# EAGLE board eurorack-bela (EAGLE 6.6.0)
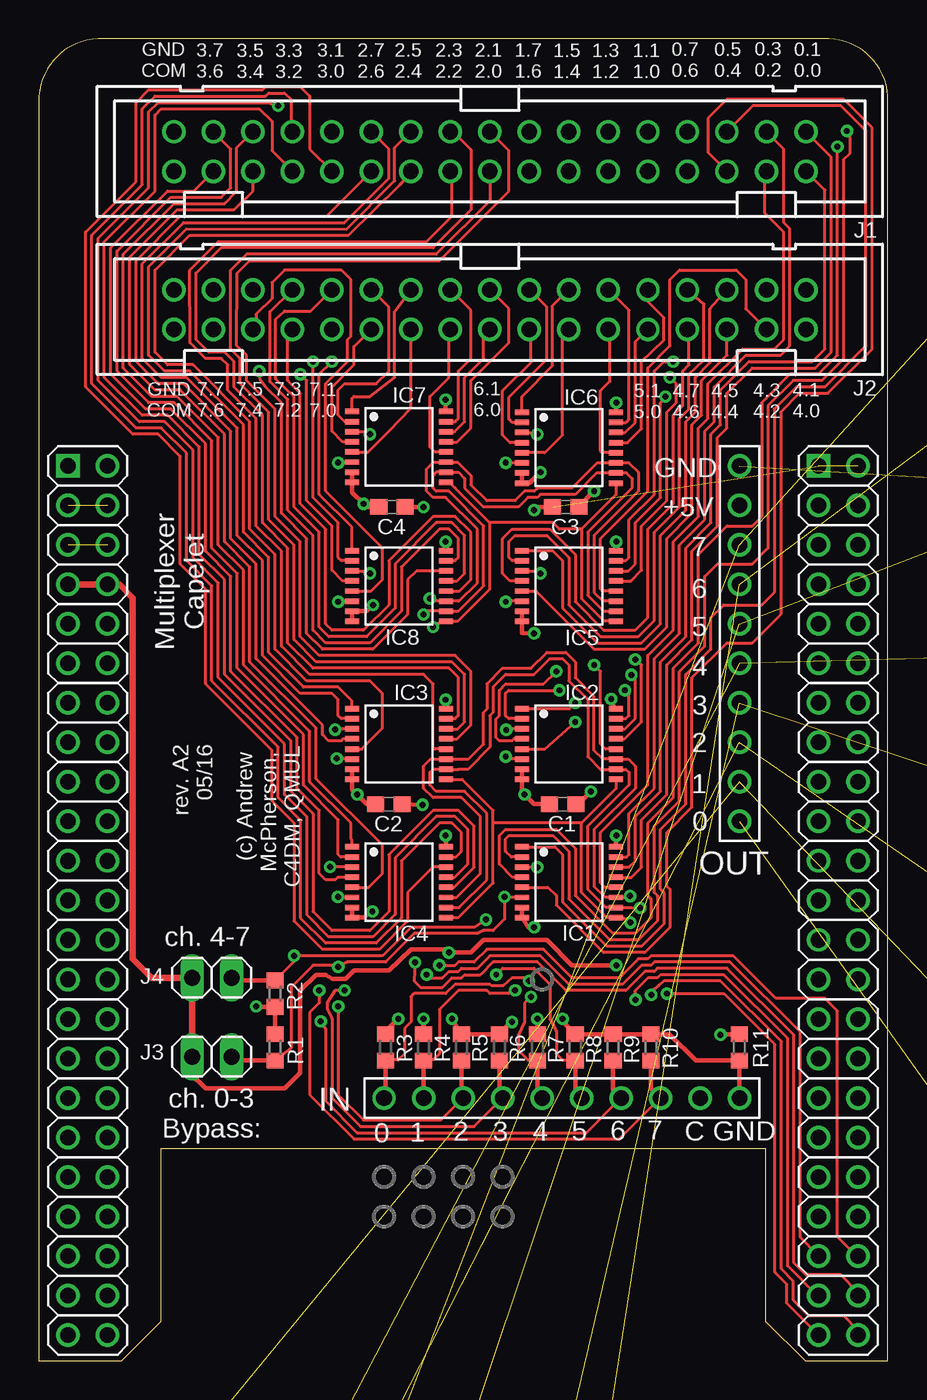
[diagram p0: board, top side]
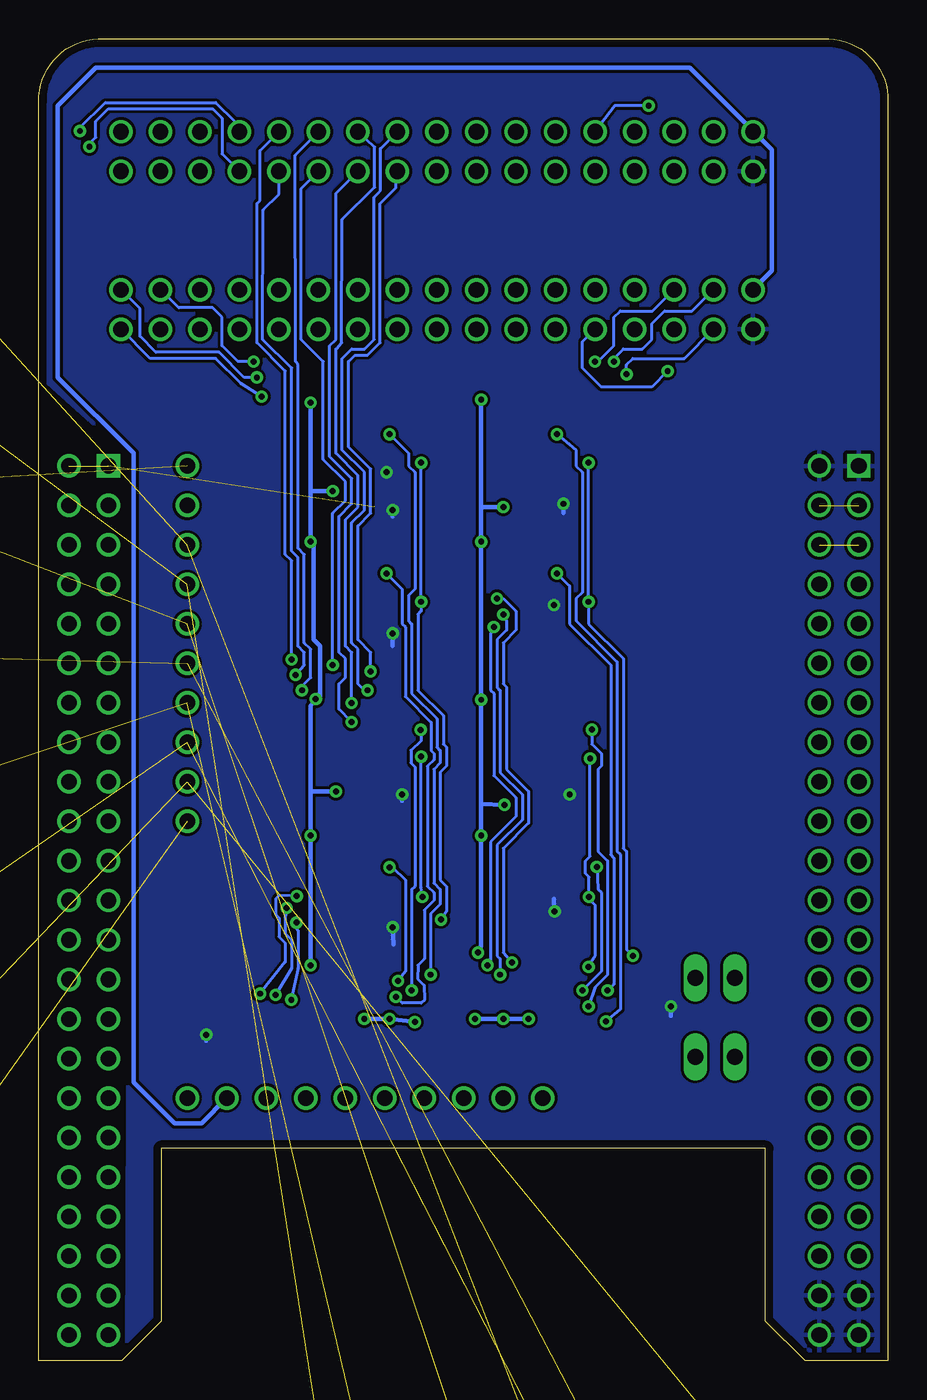
[diagram p1: board, bottom side, seen from below]

Size 54.61 x 84.99 mm. Coordinates in mm from the lower left corner, seen from the top.
Outline: 54.61,0 54.61,80.95 arc90 50.8,84.99 3.81,84.99 arc90 0,80.95 0,0 5.33,0 7.87,2.54 7.87,13.64 46.74,13.64 46.74,2.54 49.28,0 54.61,0
Copper layers (1*16): Top 0.035mm / dielectric 1.5mm / Bottom 0.035mm
Design rules "default *": minimum track width 7mil, minimum drill 15mil, track to track 7mil, track to pad 7mil, pad to pad 7mil, via to via 7mil, smd to smd 0mil, copper to edge 20mil, drill to drill 8mil, minimum pad ring 10mil, minimum via ring 8mil, stop-mask expansion 4mil, vias tented up to drill 20mil, thermal gap 10mil

## Footprints (pad centres in the part's own frame; a part is rotated, then mirrored left to right if it is on the bottom)
C0603 = smd 1.1 x 1: 1 -0.85,0; 2 0.85,0
TSSOP16-PW = smd 0.35 x 0.9: 1 -2.275,-3.025; 2 -1.625,-3.025; 3 -0.975,-3.025; 4 -0.325,-3.025; 5 0.325,-3.025; 6 0.975,-3.025; 7 1.625,-3.025; 8 2.275,-3.025; 9 2.275,3.025; 10 1.625,3.025; 11 0.975,3.025; 12 0.325,3.025; 13 -0.325,3.025; 14 -0.975,3.025; 15 -1.625,3.025; 16 -2.275,3.025
PAK100/2500-34 = drill 1 pad 1.422: 1 -20.32,-1.27; 2 -20.32,1.27; 3 -17.78,-1.27; 4 -17.78,1.27; 5 -15.24,-1.27; 6 -15.24,1.27; 7 -12.7,-1.27; 8 -12.7,1.27; 9 -10.16,-1.27; 10 -10.16,1.27; 11 -7.62,-1.27; 12 -7.62,1.27; 13 -5.08,-1.27; 14 -5.08,1.27; 15 -2.54,-1.27; 16 -2.54,1.27; 17 0,-1.27; 18 0,1.27; 19 2.54,-1.27; 20 2.54,1.27; 21 5.08,-1.27; 22 5.08,1.27; 23 7.62,-1.27; 24 7.62,1.27; 25 10.16,-1.27; 26 10.16,1.27; 27 12.7,-1.27; 28 12.7,1.27; 29 15.24,-1.27; 30 15.24,1.27; 31 17.78,-1.27; 32 17.78,1.27; 33 20.32,-1.27; 34 20.32,1.27
1X02 = drill 1.016 long: 1 -1.27,0; 2 1.27,0
JACK-3.5 = drill 1.1: P$1 0,5; P$2 0,-3.5; P$3 0,-6.5 | drill 3: P$4 0,0
R0603 = smd 1 x 1.1: 1 -0.85,0; 2 0.85,0
BELA_CAPELET_NO_OUTLINE = drill 1 square: 1 -20.32,-31.75; 47 27.94,-31.75 | drill 1: 2 -22.86,-31.75; 3 -20.32,-29.21; 4 -22.86,-29.21; 5 -20.32,-26.67; 6 -22.86,-26.67; 7 -20.32,-24.13; 8 -22.86,-24.13; 9 -20.32,-21.59; 10 -22.86,-21.59; 11 -20.32,-19.05; 12 -22.86,-19.05; 13 -20.32,-16.51; 14 -22.86,-16.51; 15 -20.32,-13.97; 16 -22.86,-13.97; 17 -20.32,-11.43; 18 -22.86,-11.43; 19 -20.32,-8.89; 20 -22.86,-8.89; 21 -20.32,-6.35; 22 -22.86,-6.35; 23 -20.32,-3.81; 24 -22.86,-3.81; 25 -20.32,-1.27; 26 -22.86,-1.27; 27 -20.32,1.27; 28 -22.86,1.27; 29 -20.32,3.81; 30 -22.86,3.81; 31 -20.32,6.35; 32 -22.86,6.35; 33 -20.32,8.89; 34 -22.86,8.89; 35 -20.32,11.43; 36 -22.86,11.43; 37 -20.32,13.97; 38 -22.86,13.97; 39 -20.32,16.51; 40 -22.86,16.51; 41 -20.32,19.05; 42 -22.86,19.05; 43 -20.32,21.59; 44 -22.86,21.59; 45 -20.32,24.13; 46 -22.86,24.13; 48 25.4,-31.75; 49 27.94,-29.21; 50 25.4,-29.21; 51 27.94,-26.67; 52 25.4,-26.67; 53 27.94,-24.13; 54 25.4,-24.13; 55 27.94,-21.59; 56 25.4,-21.59; 57 27.94,-19.05; 58 25.4,-19.05; 59 27.94,-16.51; 60 25.4,-16.51; 61 27.94,-13.97; 62 25.4,-13.97; 63 27.94,-11.43; 64 25.4,-11.43; 65 27.94,-8.89; 66 25.4,-8.89; 67 27.94,-6.35; 68 25.4,-6.35; 69 27.94,-3.81; 70 25.4,-3.81; 71 27.94,-1.27; 72 25.4,-1.27; 73 27.94,1.27; 74 25.4,1.27; 75 27.94,3.81; 76 25.4,3.81; 77 27.94,6.35; 78 25.4,6.35; 79 27.94,8.89; 80 25.4,8.89; 81 27.94,11.43; 82 25.4,11.43; 83 27.94,13.97; 84 25.4,13.97; 85 27.94,16.51; 86 25.4,16.51; 87 27.94,19.05; 88 25.4,19.05; 89 27.94,21.59; 90 25.4,21.59; 91 27.94,24.13; 92 25.4,24.13; IN_PIN1 7.62,8.89; IN_PIN2 5.08,8.89; IN_PIN3 2.54,8.89; IN_PIN4 0,8.89; IN_PIN5 -2.54,8.89; IN_PIN6 -5.08,8.89; IN_PIN7 -7.62,8.89; IN_PIN8 -10.16,8.89; IN_PIN9 -12.7,8.89; IN_PIN10 -15.24,8.89; OUT_PIN1 -15.24,-8.89; OUT_PIN2 -15.24,-11.43; OUT_PIN3 -15.24,-13.97; OUT_PIN4 -15.24,-16.51; OUT_PIN5 -15.24,-19.05; OUT_PIN6 -15.24,-21.59; OUT_PIN7 -15.24,-24.13; OUT_PIN8 -15.24,-26.67; OUT_PIN9 -15.24,-29.21; OUT_PIN10 -15.24,-31.75

## Placement (x,y rotation side)
C1  [C0603]  33.68,35.79 180 top
C2  [C0603]  22.5,35.79 180 top
C3  [C0603]  33.88,54.89 180 top
C4  [C0603]  22.71,54.89 180 top
IC1  4051B  [TSSOP16-PW]  34.09,30.76 270 top
IC2  4051B  [TSSOP16-PW]  34.09,39.65 270 top
IC3  4051B  [TSSOP16-PW]  23.16,39.65 270 top
IC4  4051B  [TSSOP16-PW]  23.16,30.76 270 top
IC5  4051B  [TSSOP16-PW]  34.09,49.81 270 top
IC6  4051B  [TSSOP16-PW]  34.09,58.7 270 top
IC7  4051B  [TSSOP16-PW]  23.16,58.75 270 top
IC8  4051B  [TSSOP16-PW]  23.16,49.81 270 top
J1  2534-  [PAK100/2500-34]  29.01,77.75 180 top
J2  2534-  [PAK100/2500-34]  29.01,67.59 180 top
J3  [1X02]  11.13,19.53 0 top
J4  [1X02]  11.13,24.61 0 top
JACK_IN_1  WQP_PJ301M-12_JACKWQP_PJ301M-12_JACK  [JACK-3.5]  20.57,-46.05 0 top  (outside the outline)
JACK_IN_2  WQP_PJ301M-12_JACKWQP_PJ301M-12_JACK  [JACK-3.5]  7.87,-13.03 0 top  (outside the outline)
JACK_IN_3  WQP_PJ301M-12_JACKWQP_PJ301M-12_JACK  [JACK-3.5]  20.57,-13.03 0 top  (outside the outline)
JACK_IN_4  WQP_PJ301M-12_JACKWQP_PJ301M-12_JACK  [JACK-3.5]  33.27,-13.03 0 top  (outside the outline)
JACK_IN_5  WQP_PJ301M-12_JACKWQP_PJ301M-12_JACK  [JACK-3.5]  7.87,-30.81 0 top  (outside the outline)
JACK_IN_6  WQP_PJ301M-12_JACKWQP_PJ301M-12_JACK  [JACK-3.5]  20.57,-30.81 0 top  (outside the outline)
JACK_IN_7  WQP_PJ301M-12_JACKWQP_PJ301M-12_JACK  [JACK-3.5]  33.27,-30.81 0 top  (outside the outline)
JACK_IN_8  WQP_PJ301M-12_JACKWQP_PJ301M-12_JACK  [JACK-3.5]  7.87,-48.59 0 top  (outside the outline)
JACK_OUT_1  WQP_PJ301M-12_JACKWQP_PJ301M-12_JACK  [JACK-3.5]  71.37,4.75 90 top  (outside the outline)
JACK_OUT_2  WQP_PJ301M-12_JACKWQP_PJ301M-12_JACK  [JACK-3.5]  71.37,14.91 90 top  (outside the outline)
JACK_OUT_3  WQP_PJ301M-12_JACKWQP_PJ301M-12_JACK  [JACK-3.5]  71.37,25.07 90 top  (outside the outline)
JACK_OUT_4  WQP_PJ301M-12_JACKWQP_PJ301M-12_JACK  [JACK-3.5]  71.37,35.23 90 top  (outside the outline)
JACK_OUT_5  WQP_PJ301M-12_JACKWQP_PJ301M-12_JACK  [JACK-3.5]  71.37,45.39 90 top  (outside the outline)
JACK_OUT_6  WQP_PJ301M-12_JACKWQP_PJ301M-12_JACK  [JACK-3.5]  71.37,55.55 90 top  (outside the outline)
JACK_OUT_7  WQP_PJ301M-12_JACKWQP_PJ301M-12_JACK  [JACK-3.5]  71.37,65.71 90 top  (outside the outline)
JACK_OUT_8  WQP_PJ301M-12_JACKWQP_PJ301M-12_JACK  [JACK-3.5]  71.37,75.87 90 top  (outside the outline)
R1  [R0603]  15.19,20.14 270 top
R2  [R0603]  15.19,23.6 90 top
R3  [R0603]  22.3,20.14 270 top
R4  [R0603]  24.74,20.14 270 top
R5  [R0603]  27.18,20.14 270 top
R6  [R0603]  29.62,20.14 270 top
R7  [R0603]  32.05,20.14 270 top
R8  [R0603]  34.49,20.14 270 top
R9  [R0603]  36.93,20.14 270 top
R10  [R0603]  39.37,20.14 270 top
R11  0  [R0603]  45.06,20.14 90 top
U$1  BELA_CAPELET_NO_OUT  [BELA_CAPELET_NO_OUTLINE]  29.82,25.78 180 top

## Library data of the parts
C1-C4 = resistor
IC1-IC8 U$1 = custom
J1 J2 = con-3m; OC_FARNELL: unknown; OC_NEWARK: unknown
J3 J4 = pinhead
JACK_IN_1-JACK_IN_8 JACK_OUT_1-JACK_OUT_8 = thonkiconn_eagle_v5
R1-R11 = rcl

## Nets
+5V: C1.1 C2.1 C3.1 C4.1 IC1.16 IC2.16 IC3.16 IC4.16 IC5.16 IC6.16 IC7.16 IC8.16 J3.1 J4.1 U$1.53 U$1.54
AIN0: U$1.85
GND: C1.2 C2.2 C3.2 C4.2 IC1.7 IC1.8 IC2.7 IC2.8 IC3.7 IC3.8 IC4.7 IC4.8 IC5.7 IC5.8 IC6.7 IC6.8 IC7.7 IC7.8 IC8.7 IC8.8 J1.34 J2.34 R1.1 R2.1 R11.2 U$1.1 U$1.2 U$1.47 U$1.48 U$1.89 U$1.90 U$1.91 U$1.92
IN0: IC1.3 R3.2 U$1.IN_PIN1
IN1: IC2.3 R4.2 U$1.IN_PIN2
IN2: IC3.3 R5.2 U$1.IN_PIN3
IN3: IC4.3 R6.2 U$1.IN_PIN4
IN4: IC5.3 R7.2 U$1.IN_PIN5
IN5: IC6.3 R8.2 U$1.IN_PIN6
IN6: IC7.3 R9.2 U$1.IN_PIN7
IN7: IC8.3 R10.2 U$1.IN_PIN8
IN_COM: J1.33 J2.33 U$1.IN_PIN9
IN_GND: R3.1 R4.1 R5.1 R6.1 R7.1 R8.1 R9.1 R10.1 R11.1 U$1.IN_PIN10
J2: IC7.15 J2.19
MUX1A: IC1.11 IC2.11 IC3.11 IC4.11 U$1.45
MUX1B: IC1.10 IC2.10 IC3.10 IC4.10 U$1.46
MUX1C: IC1.9 IC2.9 IC3.9 IC4.9 U$1.43
MUX1INH: IC1.6 IC2.6 IC3.6 IC4.6 J3.2 R1.2
MUX2A: IC5.11 IC6.11 IC7.11 IC8.11 U$1.44
MUX2B: IC5.10 IC6.10 IC7.10 IC8.10 U$1.41
MUX2C: IC5.9 IC6.9 IC7.9 IC8.9 U$1.42
MUX2INH: IC5.6 IC6.6 IC7.6 IC8.6 J4.2 R2.2
N$1: IC6.13 J2.9
N$2: IC6.14 J2.10
N$3: IC6.15 J2.11
N$4: IC6.12 J2.12
N$5: IC6.1 J2.13
N$6: IC6.5 J2.14
N$7: IC6.2 J2.15
N$8: IC6.4 J2.16
N$9: IC5.13 J2.1
N$10: IC5.14 J2.2
N$11: IC5.15 J2.3
N$12: IC5.12 J2.4
N$13: IC5.1 J2.5
N$14: IC5.5 J2.6
N$15: IC5.2 J2.7
N$16: IC5.4 J2.8
N$17: IC7.13 J2.17
N$18: IC7.14 J2.18
N$20: IC7.12 J2.20
N$21: IC7.1 J2.21
N$22: IC7.5 J2.22
N$23: IC7.2 J2.23
N$24: IC7.4 J2.24
N$25: IC8.13 J2.25
N$26: IC8.14 J2.26
N$27: IC8.15 J2.27
N$28: IC8.12 J2.28
N$29: IC8.1 J2.29
N$30: IC8.5 J2.30
N$31: IC8.2 J2.31
N$32: IC8.4 J2.32
N$33: IC1.13 J1.1
N$34: IC1.14 J1.2
N$35: IC1.15 J1.3
N$36: IC1.12 J1.4
N$37: IC1.1 J1.5
N$38: IC1.5 J1.6
N$39: IC1.2 J1.7
N$40: IC1.4 J1.8
N$41: IC2.13 J1.9
N$42: IC2.14 J1.10
N$43: IC2.15 J1.11
N$44: IC2.12 J1.12
N$45: IC2.1 J1.13
N$46: IC2.5 J1.14
N$47: IC2.2 J1.15
N$48: IC2.4 J1.16
N$49: IC3.13 J1.17
N$50: IC3.14 J1.18
N$51: IC3.15 J1.19
N$52: IC3.12 J1.20
N$53: IC3.1 J1.21
N$54: IC3.5 J1.22
N$55: IC3.2 J1.23
N$56: IC3.4 J1.24
N$57: IC4.13 J1.25
N$58: IC4.14 J1.26
N$59: IC4.15 J1.27
N$60: IC4.12 J1.28
N$61: IC4.1 J1.29
N$62: IC4.5 J1.30
N$63: IC4.2 J1.31
N$64: IC4.4 J1.32
OUT1: JACK_IN_1.P$1 JACK_OUT_1.P$1 U$1.OUT_PIN1
OUT2: JACK_IN_2.P$1 JACK_OUT_2.P$1 U$1.OUT_PIN2
OUT3: JACK_IN_3.P$1 JACK_OUT_3.P$1 U$1.OUT_PIN3
OUT4: JACK_IN_4.P$1 JACK_OUT_4.P$1 U$1.OUT_PIN4
OUT5: JACK_IN_5.P$1 JACK_OUT_5.P$1 U$1.OUT_PIN5
OUT6: JACK_IN_6.P$1 JACK_OUT_6.P$1 U$1.OUT_PIN6
OUT7: JACK_IN_7.P$1 JACK_OUT_7.P$1 U$1.OUT_PIN7
OUT8: JACK_IN_8.P$1 JACK_OUT_8.P$1 U$1.OUT_PIN8
OUT_GND: JACK_IN_1.P$3 JACK_IN_2.P$3 JACK_IN_3.P$3 JACK_IN_4.P$3 JACK_IN_5.P$3 JACK_IN_6.P$3 JACK_IN_7.P$3 JACK_IN_8.P$3 JACK_OUT_1.P$3 JACK_OUT_2.P$3 JACK_OUT_3.P$3 JACK_OUT_4.P$3 JACK_OUT_5.P$3 JACK_OUT_6.P$3 JACK_OUT_7.P$3 JACK_OUT_8.P$3 U$1.OUT_PIN10
VDD_3V3EXP: U$1.49 U$1.50
VDD_5V: U$1.51 U$1.52

## Tracks (layer width: path | path; a pad name or v marks a point on that pad's centre or on a via)
+5V  (via drill 0.38)
  Top 0.305: IC6.16 37.11,61.57 v37.13,61.59 | v37.13,52.65 37.13,52.11 IC5.16 | IC8.16 26.19,52.63 v26.16,52.65 | v26.16,61.8 26.16,61.26 IC7.16 | C4.1 v24.74,54.89 | C3.1 34.73,54.93 v35.71,55.91 | IC3.16 26.19,42.47 v26.16,42.49 | IC2.16 36.7,42.47 v36.8,42.55 | IC1.16 37.11,33.73 v37.13,33.76 | IC4.16 26.19,33.73 v26.16,33.76 | C1.1 34.7,35.79 v35.51,36.6 | C2.1 v24.67,35.74 | J3.1 9.7,19.38 9.7,18.52 10.72,17.5 15.8,17.5 16.81,18.52 16.81,23.8 17.83,24.82 18.44,24.82 18.9,24.54 19.71,24.54 20.28,25.11 22.52,25.11 23.93,26.44 26.16,26.44 v26.37,26.24 27.79,26.24 28.6,27.05 32.66,27.05 34.29,25.43 v37.13,25.43
  Top 0.406: J3.1 J4.1 7.26,24.61 6.05,25.83 6.05,49.05 5.18,49.91 U$1.54 U$1.53
  Bottom 0.305: v37.13,61.59 37.13,55.91 | 37.13,55.91 v37.13,52.65 36.93,52.45 36.93,46.36 36.52,45.95 36.52,42.7 v36.8,42.55 37.13,42.09 37.13,36.6 | 26.16,54.89 v26.16,52.65 v26.16,42.49 26.16,35.79 | 26.16,54.89 v26.16,61.8 | v24.74,54.89 26.16,54.89 | v35.71,55.91 37.13,55.91 | 37.13,36.6 v37.13,33.76 v37.13,25.43 | 26.16,35.79 v26.16,33.76 26.16,26.64 26.37,26.44 v26.37,26.24 | v35.51,36.6 37.13,36.6 | v24.67,35.74 26.16,35.79
GND  (via drill 0.38)  (2 unrouted)
  Top 0.305: IC6.7 IC6.8 31.56,56.42 v32.26,57.12 | IC5.8 IC5.7 31.06,46.78 v31.85,46.76 | IC8.8 IC8.7 21.08,48.19 v21.49,48.59 | IC7.7 IC7.8 20.14,55.83 v20.88,55.09 21.08,54.89 C4.2 | C3.2 31.85,54.89 v31.85,54.69 | IC2.7 IC2.8 31.06,36.58 v31.24,36.4 31.85,35.79 C1.2 | IC3.7 IC3.8 20.14,36.73 v20.47,36.4 21.08,35.79 C2.2 | IC4.7 IC4.8 20.89,28.49 v21.44,28.88 | IC1.7 IC1.8 31.46,27.88 v31.85,27.86 | R1.1 R2.1 14.14,22.75 v13.97,22.78 | R11.2 43.88,20.99 v43.84,20.96
  Bottom 0.305: v20.88,55.09 20.88,54.48 | v31.85,54.69 31.85,54.28 | v31.24,36.4 31.24,35.99 | v21.44,28.88 21.49,29.69 | v31.85,27.86 31.8,26.77 | v20.47,36.4 20.47,36.19 | v32.26,57.12 32.26,57.33 | v31.85,46.76 31.85,45.95 | v21.49,48.59 21.49,48.79 | v13.97,22.78 13.97,22.17 | v43.84,20.96 43.84,20.55
  pour Bottom: 54.61,84.76 0.06,84.76 0.06,-0.1 48.92,0.1 48.72,58.14 54.61,63.42
IN0  (via drill 0.38)
  Top 0.178: IC1.3 32.25,31.74 v32.05,31.72 | v31.52,24.41 31.31,24.61 30.43,24.61 29.86,24.1 29.11,24.1 29.01,24.21 26.77,24.21 26.16,23.6 24.13,23.6 23.93,23.39 23.93,21.77 23.52,21.36 23.52,19.74 23.11,19.33 22.34,19.33 R3.2
  Top 0.305: R3.2 22.3,16.99 U$1.IN_PIN1
  Bottom 0.178: v32.05,31.72 31.85,31.72 31.04,30.91 31.04,25.02 v31.52,24.41
IN1  (via drill 0.38)
  Top 0.178: IC2.3 30.19,40.62 v30.05,40.56 | v30.63,23.8 30.43,23.8 30.23,23.6 29.01,23.6 28.8,23.8 26.98,23.8 25.76,22.58 25.76,19.74 25.35,19.33 24.78,19.33 R4.2
  Top 0.305: R4.2 U$1.IN_PIN2
  Bottom 0.178: v30.05,40.56 30.02,39.85 30.68,39.24 30.68,38.43 30.43,38.18 30.43,30.51 30.63,30.3 v30.63,23.8
IN2  (via drill 0.38)
  Top 0.178: IC3.3 19.21,40.62 v19.05,40.57 | v19.25,22.78 19.25,17.09 20.88,15.47 25.86,15.47 U$1.IN_PIN3
  Top 0.305: R5.2 27.18,16.99 U$1.IN_PIN3
  Bottom 0.178: v19.05,40.57 19.05,39.65 18.44,39.04 18.44,38.23 18.64,38.02 18.64,32.74 18.03,32.13 18.03,24.82 18.85,24 v19.25,22.78
IN3  (via drill 0.38)
  Top 0.178: IC4.3 18.65,31.74 v18.73,31.74 | v19.66,23.8 19.05,23.8 18.54,23.02 18.54,22.61 18.85,21.97 18.85,16.89 20.68,15.06 27.99,15.06 U$1.IN_PIN4
  Top 0.305: R6.2 29.62,17.09 U$1.IN_PIN4
  Bottom 0.178: v18.73,31.74 18.64,30.3 18.44,30.1 18.44,25.02 v19.66,23.8
IN4  (via drill 0.38)
  Top 0.178: IC5.3 32.1,50.78 v32.26,50.62 | v31.65,23.39 31.24,22.99 31.24,21.77 30.84,20.96 30.84,19.94 31.45,19.33 32.02,19.33 R7.2
  Top 0.305: R7.2 32.05,17.2 U$1.IN_PIN5
  Bottom 0.178: v32.26,50.62 31.24,49.61 31.24,47.37 31.04,47.17 31.04,42.7 29.39,41.05 29.39,39.22 29.21,39.04 29.21,38.63 29.62,38.23 29.62,30.51 29.21,30.1 29.21,29.58 29.82,28.97 29.82,25.83 30.23,25.43 30.25,24.55 29.84,24.14 29.82,23.19 30.02,22.99 31.24,22.99 v31.65,23.39
IN5  (via drill 0.38)
  Top 0.178: IC6.3 31.94,59.67 v32.05,59.56 | v29.41,24.82 29.82,25.22 31.85,25.22 32.87,24.21 32.87,21.97 33.27,21.16 33.27,19.74 33.68,19.33 34.46,19.33 R8.2
  Top 0.305: R8.2 34.49,17.3 U$1.IN_PIN6
  Bottom 0.178: v32.05,59.56 30.84,58.34 30.84,57.53 30.43,57.12 30.43,49.61 30.84,49.2 30.84,47.57 30.63,47.37 30.63,42.9 29.01,41.27 29.01,39.45 28.8,39.24 28.8,38.43 29.21,38.02 29.21,30.71 28.8,30.3 28.8,29.34 29.41,28.73 v29.41,24.82
IN6  (via drill 0.38)
  Top 0.178: IC7.3 21.12,59.72 v21.28,59.56 | v18.13,21.82 18.44,21.36 18.44,16.69 20.47,14.66 35.2,14.66 U$1.IN_PIN7
  Top 0.305: R9.2 36.93,17.4 U$1.IN_PIN7
  Bottom 0.178: v21.28,59.56 20.07,58.55 20.07,57.53 19.66,57.12 19.66,49.4 20.07,49 20.07,47.57 17.42,44.93 17.42,32.74 17.22,32.54 17.22,22.58 v18.13,21.82
IN7  (via drill 0.38)
  Top 0.178: IC8.3 21.12,50.78 v21.28,50.62 | v18.03,23.8 18.03,22.99 17.42,22.38 17.42,17.09 20.27,14.25 37.34,14.25 U$1.IN_PIN8
  Top 0.305: R10.2 39.37,17.5 U$1.IN_PIN8
  Bottom 0.178: v21.28,50.62 20.47,49.81 20.47,47.37 17.83,44.73 17.83,32.54 17.63,32.33 17.63,24.21 v18.03,23.8
IN_COM
  Bottom 0.305: J2.33 7.47,70.08 7.47,77.85 8.64,79.02 J1.33 8.69,79.07 12.75,83.13 50.95,83.13 53.39,80.7 53.39,63.22 48.51,58.34 48.51,17.91 45.87,15.27 44.15,15.27 U$1.IN_PIN9
IN_GND  (via drill 0.38)
  Top 0.305: U$1.IN_PIN10 R11.1 42.25,19.29 40.55,20.99 R10.1 R9.1 R8.1 33.51,21.97 v33.68,21.97 | R7.1 v32.05,21.97 | v30.43,21.77 29.62,21.16 R6.1 R5.1 v26.57,21.97 | v24.74,21.97 R4.1 | R3.1 22.3,21.16 v23.11,21.97
  Bottom 0.305: v33.68,21.97 v32.05,21.97 v30.43,21.77 | v26.57,21.97 v24.74,21.97 v23.11,21.97
J2
  Top 0.178: IC7.15 26.77,60.38 26.98,60.58 26.98,63.63 27.79,64.44 27.79,67.54 J2.19
MUX1A  (via drill 0.38)
  Top 0.178: IC4.11 26.86,29.79 28.4,31.32 28.4,34.98 27.18,36.19 25.35,36.19 24.74,36.8 24.74,38.23 25.19,38.67 IC3.11 27.62,38.67 28.6,39.65 28.6,41.68 28.8,41.88 28.8,43.51 29.82,44.53 31.65,44.53 32.66,45.54 33.88,45.54 34.49,44.93 34.49,43.92 35.71,42.7 35.71,39.24 36.28,38.67 IC2.11 37.91,38.67 38.35,38.23 38.35,36.8 35.71,34.16 35.71,30.51 36.43,29.79 IC1.11 37.84,29.79 v38.02,29.87 | U$1.45 48.11,3.68 48.11,4.9 47.35,5.69 47.35,20.32 44.04,23.6 v40.39,23.6
  Bottom 0.178: v38.02,29.87 39.17,29.9 39.37,29.69 39.37,28.68 39.17,28.47 39.17,27.25 38.76,26.85 38.76,25.63 v40.39,23.6
MUX1B  (via drill 0.38)
  Top 0.178: IC4.10 27.03,29.14 28.8,30.91 28.8,35.18 27.38,36.6 25.55,36.6 25.15,37.01 25.15,37.82 25.35,38.02 IC3.10 26.98,38.02 27.58,38.02 29.01,39.45 29.01,41.48 29.21,41.68 29.21,43.31 30.02,44.12 31.85,44.12 32.87,45.14 33.68,45.14 34.09,44.73 34.09,43.71 35.31,42.49 35.31,38.84 36.12,38.02 IC2.10 37.74,38.02 37.95,37.82 37.95,37.01 35.31,34.37 35.31,30.3 36.47,29.14 IC1.10 38.1,29.14 v38.67,29.1 | U$1.46 52.68,1.96 51.77,2.87 49.53,2.87 48.51,3.89 48.51,5.11 47.75,5.89 47.75,20.52 43.84,24.41 40.18,24.41 39.86,24.14 39.57,23.9 v39.38,23.51
  Bottom 0.178: v38.67,29.1 38.76,28.47 38.76,27.46 38.35,27.05 38.35,25.22 v39.38,23.51
MUX1C  (via drill 0.38)
  Top 0.178: IC2.9 37.11,36.78 34.9,34.57 | IC4.9 26.99,28.49 29.21,30.71 29.21,34.57 | 29.21,34.57 29.21,35.38 27.22,37.38 IC3.9 | 34.9,34.57 29.21,34.57 | 34.9,34.57 34.9,30.1 36.51,28.49 IC1.9 37.53,28.49 v38.05,28.17 | U$1.43 50.04,4.19 48.16,6.1 48.16,20.73 44.04,24.82 39.98,24.82 39.78,24.61 39.17,24.61 38.35,23.8 38.32,23.76 v38.37,23.21
  Bottom 0.178: v38.05,28.17 38.05,27.76 37.95,27.66 37.95,25.22 v38.37,23.21
MUX1INH  (via drill 0.38)
  Top 0.178: IC4.6 19.26,29.79 v19.23,29.81 | 19.25,38.63 v19.16,38.73 19.41,38.67 IC3.6 | IC1.6 30.13,29.79 v29.95,29.82 29.95,28.4 29.21,27.66 28.6,27.66 28.19,27.46 24.13,27.46 22.3,25.63 19.86,25.63 v19.25,25.32 19.05,25.43 17.63,25.43 16.2,24 16.2,20.11 R1.2 | IC2.6 30.19,38.67 v30.02,38.84
  Top 0.305: R1.2 12.64,19.29 J3.2
  Bottom 0.178: v19.16,38.73 19.16,32.43 19.46,32.13 19.46,31.32 19.23,31.09 v19.23,29.81 19.23,29.67 18.85,29.29 18.85,26.04 19.25,25.43 v19.25,25.32 | v29.95,29.82 30.02,30.46 v30.02,38.84
MUX2A  (via drill 0.38)
  Top 0.178: IC5.11 36.28,48.83 35.71,49.4 35.71,53.06 38.56,55.91 38.56,57.12 37.96,57.72 IC6.11 35.91,57.72 34.29,56.11 32.05,56.11 31.85,55.91 31.24,55.91 30.63,55.3 28.8,55.3 27.79,56.31 27.79,56.92 26.93,57.77 IC7.11 25.39,57.77 24.94,57.33 24.94,55.91 25.35,55.5 26.16,55.5 28.19,53.47 28.19,50.01 27.02,48.83 IC8.11 25.39,48.83 v25.15,49 | U$1.44 52.68,4.39 51.56,5.51 49.33,5.51 48.56,6.3 48.56,20.93 44.25,25.22 39.78,25.22 39.57,25.02 38.96,25.02 37.74,23.8 33.88,23.8 32.05,25.63 29.21,25.63 28.4,24.82 27.38,24.82 27.18,24.61 26.57,24.61 25.96,24 24.54,24 24.13,24.41 v24.19,25.61
  Bottom 0.178: v25.15,49 24.74,49 23.93,48.18 23.93,46.97 24.74,46.15 24.74,43.51 24.54,43.31 24.54,38.02 23.11,36.6 23.11,34.57 24.74,32.94 24.74,26.24 v24.19,25.61
MUX2B  (via drill 0.38)
  Top 0.178: IC5.10 36.32,48.18 35.31,49.2 35.31,53.26 38.15,56.11 38.15,56.72 37.8,57.08 IC6.10 35.87,57.08 34.49,55.7 32.26,55.7 32.05,55.5 31.45,55.5 30.84,54.89 28.6,54.89 27.38,56.11 27.38,56.72 26.97,57.12 IC7.10 25.55,57.12 25.35,56.92 25.35,56.11 25.55,55.91 26.37,55.91 28.6,53.67 28.6,49.81 26.98,48.19 IC8.10 24.94,48.19 v24.74,47.98 | U$1.41 48.97,7.93 48.97,21.13 44.45,25.63 39.57,25.63 39.37,25.43 38.76,25.43 37.54,24.21 34.09,24.21 32.26,26.04 29.01,26.04 28.19,25.22 27.18,25.22 26.98,25.02 26.37,25.02 25.96,24.61 25.15,24.61 v24.94,24.82
  Bottom 0.178: v24.74,47.98 24.74,47.78 24.54,47.57 24.54,46.97 25.15,46.36 25.15,43.31 24.94,43.1 24.94,37.82 23.52,36.4 23.52,34.77 25.15,33.15 25.15,26.04 24.94,25.83 v24.94,24.82
MUX2C  (via drill 0.38)
  Top 0.178: IC6.9 37.11,55.68 34.9,53.47 | 34.9,53.47 34.9,49 36.32,47.57 37.07,47.57 IC5.9 | 29.01,53.86 29.01,49.61 26.94,47.53 IC8.9 25.92,47.53 v25.35,47.17 | 29.01,53.86 26.77,56.11 26.41,56.47 IC7.9 | 34.9,53.47 33.48,53.47 33.07,53.87 29.02,53.87 29.01,53.86 | U$1.42 52.58,6.73 51.36,7.95 51.36,22.48 50.55,23.29 47.4,23.29 44.65,26.04 39.37,26.04 39.17,25.83 38.56,25.83 37.34,24.61 34.29,24.61 32.46,26.44 28.8,26.44 27.99,25.63 26.98,25.63 26.77,25.43 v25.76,25.43
  Bottom 0.178: v25.35,47.17 25.35,46.97 25.55,46.76 25.55,43.1 25.35,42.9 25.35,37.62 23.93,36.19 23.93,34.98 25.55,33.35 25.55,25.63 v25.76,25.43
MUX2INH  (via drill 0.38)
  Top 0.178: IC8.6 19.29,48.83 v19.25,48.79 | v19.25,57.73 20.1,57.73 IC7.6 | IC5.6 30.06,48.83 v30.02,48.79 | v30.02,57.73 31.05,57.73 IC6.6 | v28.75,28.36 27.99,27.86 23.93,27.86 22.1,26.04 v16.41,26.04 16.41,25.67 R2.2
  Top 0.305: R2.2 12.56,24.45 J4.2
  Bottom 0.178: v19.25,57.73 v19.25,48.79 19.25,47.37 17.02,45.14 17.02,32.94 16.81,32.74 16.81,26.44 v16.41,26.04 | v30.02,57.73 v30.02,48.79 30.02,48.18 30.23,47.98 30.23,43.1 28.6,41.48 28.6,39.65 28.4,39.45 28.4,38.23 28.8,37.82 28.8,30.91 28.4,30.51 28.4,28.88 v28.75,28.36
N$1
  Top 0.178: IC6.13 37.87,59.02 38.76,59.92 38.76,64.24 40.21,65.63 40.21,67.06 39.17,68.1 J2.9
N$2
  Top 0.178: IC6.14 37.7,59.67 38.35,60.33 38.35,65.51 J2.10
N$3
  Top 0.178: IC6.15 37.74,60.33 37.95,60.53 37.95,67.54 J2.11
N$4
  Top 0.178: IC6.12 36.24,58.38 36.12,58.5 36.12,62.36 36.73,62.97 36.73,66.22 J2.12
N$5
  Top 0.178: IC6.1 31.06,61.97 33.05,63.98 33.05,67.84 J2.13
N$6
  Top 0.178: J2.14 33.68,65.91 33.68,59.51 32.54,58.38 IC6.5
N$7
  Top 0.178: IC6.2 30.43,60.33 30.23,60.53 30.23,61.95 32.66,64.39 32.66,67.74 J2.15
N$8
  Top 0.178: IC6.4 30.31,59.02 29.82,59.51 29.82,62.36 31.65,64.19 31.65,66.22 J2.16
N$9  (via drill 0.38)
  Top 0.178: IC5.13 38.07,50.13 38.76,50.83 38.76,53.67 40.39,55.3 40.39,60.99 41,61.59 41,62.81 v40.59,63.22
  Bottom 0.178: v40.59,63.22 41.4,63.22 43.03,64.85 47.09,64.85 48.11,65.86 48.11,67.64 J2.1
N$10  (via drill 0.38)
  Top 0.178: IC5.14 37.91,50.78 38.35,51.23 38.35,53.87 39.98,55.5 39.98,61.59 v40.29,61.99
  Bottom 0.178: v40.29,61.99 41.6,62.81 43.23,64.44 47.45,64.44 J2.2
N$11  (via drill 0.38)
  Top 0.178: IC5.15 37.74,51.44 37.95,51.64 37.95,54.08 39.57,55.7 39.57,63.63 40.18,64.24 v40.79,64.24
  Bottom 0.178: v40.79,64.24 41.81,64.24 42.82,65.25 42.82,67.08 43.43,67.69 45.62,67.69 J2.3
N$12
  Top 0.178: IC5.12 36.24,49.48 36.12,49.61 36.12,52.86 39.17,55.91 39.17,63.83 40.59,65.25 40.59,69.52 41.2,70.13 44.86,70.13 45.47,69.52 45.47,67.64 J2.4
N$13
  Top 0.178: IC5.1 33.03,52.08 33.68,51.44 33.68,48.39 35.92,46.15 38.76,46.15 39.98,47.37 39.98,53.06 41.6,54.69 41.6,60.38 42.21,60.99 42.21,63.22 43.16,64.16 43.16,67.64 J2.5
N$14
  Top 0.178: IC5.5 31.97,49.48 35.71,45.75 38.96,45.75 40.39,47.17 40.39,52.86 42.01,54.48 42.01,60.17 42.62,60.78 42.62,63.02 44.25,64.64 J2.6
N$15
  Top 0.178: IC5.2 30.43,51.44 30.23,51.64 30.23,52.65 30.63,53.06 32.66,53.06 34.09,51.64 34.09,48.59 36.12,46.56 38.56,46.56 39.57,47.57 39.57,53.26 41.2,54.89 41.2,60.58 41.81,61.19 41.81,63.42 42.77,64.34 42.77,67.94 J2.7
N$16
  Top 0.178: IC5.4 30.31,50.13 29.82,50.62 29.82,52.86 30.43,53.47 32.87,53.47 34.49,51.84 34.49,48.79 36.32,46.97 38.35,46.97 39.17,47.78 39.17,53.47 40.79,55.09 40.79,60.78 41.4,61.39 41.4,63.63 41.81,64.03 41.81,66.22 J2.8
N$17
  Top 0.178: IC7.13 26.89,59.08 27.79,59.97 27.79,63.02 30.23,65.46 30.23,67.64 J2.17
N$18
  Top 0.178: IC7.14 26.73,59.72 27.38,60.38 27.38,63.22 28.6,64.44 28.6,65.91 J2.18
N$20
  Top 0.178: IC7.12 25.47,58.42 25.15,58.75 25.15,62 26.37,63.22 26.37,66.22 J2.20
N$21
  Top 0.178: IC7.1 20.14,61.87 20.27,62 21.28,62 22.88,63.22 22.88,67.44 J2.21
N$22
  Top 0.178: IC7.5 21.16,58.42 22.5,59.77 23.93,61.24 J2.22
N$23
  Top 0.178: IC7.2 19.66,60.38 19.25,60.78 19.25,62.41 19.66,62.81 21.69,62.81 22.5,63.63 22.5,67.74 J2.23
N$24
  Top 0.178: IC7.4 19.54,59.08 18.85,59.77 18.85,62.61 20.27,64.03 20.27,65.2 J2.24
N$25
  Top 0.178: IC8.13 26.89,50.13 27.38,50.62 27.38,53.06 26.57,53.87 25.55,53.87 22.91,51.23 22.91,48.39 21.08,46.56 18.64,46.56 18.03,47.17 18.03,53.26 16.41,54.89 16.41,62 15.24,63.12 15.24,66.98 15.8,67.49 17.48,67.49 J2.25
N$26  (via drill 0.38)
  Top 0.178: IC8.14 24.29,50.78 23.72,50.22 23.72,47.98 21.49,45.75 18.24,45.75 17.22,46.76 17.22,52.86 15.6,54.48 15.6,61.59 14.58,62.61 14.28,63.02 v14.17,63.63
  Bottom 0.178: v14.17,63.63 15.19,62.61 18.44,62.61 19.66,63.83 19.66,65.51 J2.26
N$27
  Top 0.178: IC8.15 26.77,51.44 26.98,51.64 26.98,52.86 26.37,53.47 25.76,53.47 23.32,51.03 23.32,48.18 21.28,46.15 18.44,46.15 17.63,46.97 17.63,53.06 16,54.69 16,61.8 14.86,62.94 14.86,67.46 J2.27
N$28
  Top 0.178: IC8.12 27.06,49.48 27.79,50.22 27.79,53.26 26.77,54.28 25.35,54.28 22.5,51.44 22.5,48.59 20.88,46.97 18.85,46.97 18.44,47.37 18.44,53.47 16.81,55.09 16.81,62.2 16,63.02 16,66.02 J2.28
N$29  (via drill 0.38)
  Top 0.178: IC8.1 20.14,53.6 18.03,55.7 18.03,63.42 v18.85,64.24
  Bottom 0.178: v18.85,64.24 18.64,64.24 17.63,65.25 17.63,67.08 17.22,67.49 15.14,67.49 J2.29
N$30
  Top 0.178: IC8.5 21.37,49.48 22.1,50.22 22.1,52.25 18.44,55.91 18.44,62.81 19.86,64.24 19.86,65.66 20.07,65.86 20.07,69.52 19.46,70.13 15.8,70.13 14.99,69.32 14.99,68.3 13.97,67.28 13.97,66.52 J2.30
N$31  (via drill 0.38)
  Top 0.178: IC8.2 19.46,51.44 19.25,51.64 19.25,53.87 17.63,55.5 v17.63,64.24
  Bottom 0.178: v17.63,64.24 17.63,64.44 17.02,65.05 15.8,65.05 15.19,65.66 15.19,66.67 14.38,67.49 12.6,67.49 J2.31
N$32  (via drill 0.38)
  Top 0.178: IC8.4 19.54,50.13 18.85,50.83 18.85,53.67 17.22,55.3 17.22,63.02 v16.81,63.42
  Bottom 0.178: v16.81,63.42 16.81,64.03 16.41,64.44 13.11,64.44 J2.32
N$33
  Top 0.178: IC1.13 38.12,31.09 38.76,31.72 38.76,34.77 40.39,36.4 40.39,44.73 42.01,46.36 42.01,52.05 43.64,53.67 43.64,59.36 44.25,59.97 44.25,62.2 45.87,63.83 49.94,63.83 50.95,64.85 50.95,77.39 J1.1
N$34
  Top 0.178: IC1.14 37.96,31.74 38.35,32.13 38.35,34.98 39.98,36.6 39.98,44.93 41.6,46.56 41.6,52.25 43.23,53.87 43.23,59.56 43.84,60.17 43.84,62.41 45.67,64.24 49.73,64.24 50.55,65.05 50.55,75.26 J1.2
N$35
  Top 0.178: IC1.15 37.8,32.39 37.95,32.54 37.95,35.18 39.57,36.8 39.57,45.14 41.2,46.76 41.2,52.45 42.82,54.08 42.82,59.77 43.43,60.38 43.43,62.61 45.47,64.64 47.7,64.64 48.28,65.25 48.28,72.8 47.9,73.18 47.9,77.9 J1.3
N$36
  Top 0.178: IC1.12 36.39,30.43 36.12,30.71 36.12,33.96 39.17,37.01 39.17,45.34 40.79,46.97 40.79,52.65 42.42,54.28 42.42,59.97 43.03,60.58 43.03,62.81 45.26,65.05 47.3,65.05 47.9,65.66 47.9,72.57 46.69,73.79 46.69,76.38 J1.4
N$37
  Top 0.178: IC1.1 33.18,33.03 33.68,32.54 33.68,29.49 36.52,26.64 38.76,26.64 40.18,28.07 40.18,30.1 39.98,30.3 39.98,34.16 41.6,35.79 41.6,44.12 43.23,45.75 43.23,47.78 44.04,48.59 46.48,48.59 47.3,49.4 47.3,61.19 48.72,62.61 50.55,62.61 53.19,65.25 53.19,79.07 51.56,80.7 45.92,80.7 J1.5
N$38
  Top 0.178: IC1.5 32.73,30.43 33.27,29.9 33.27,29.29 36.32,26.24 38.96,26.24 40.59,27.86 40.59,30.3 40.39,30.51 40.39,33.96 42.01,35.59 42.01,43.92 44.25,46.15 45.87,46.15 47.7,47.98 47.7,60.99 48.92,62.2 50.75,62.2 53.59,65.05 53.59,79.27 51.77,81.1 44.25,81.1 43.03,79.88 43.03,77.7 J1.6
N$39  (via drill 0.38)
  Top 0.178: IC1.2 30.38,32.39 30.02,32.74 30.02,33.55 30.23,33.76 33.07,33.76 34.09,32.74 34.09,29.69 36.73,27.05 38.56,27.05 39.78,28.27 39.78,29.9 39.57,30.1 39.57,34.37 41.2,35.99 41.2,44.32 42.82,45.95 42.82,50.42 43.64,51.23 45.87,51.23 46.89,52.25 46.89,61.39 48.51,63.02 50.34,63.02 51.77,64.44 51.77,77.24 52.17,77.65 52.17,78.66 51.97,78.87 v51.97,79.07
  Bottom 0.178: v51.97,79.07 51.97,79.27 50.34,80.9 43.23,80.9 42.01,79.68 42.01,79.32 J1.7
N$40  (via drill 0.38)
  Top 0.178: IC1.4 30.46,31.09 29.62,31.93 29.62,33.76 30.02,34.16 33.27,34.16 34.49,32.94 34.49,29.9 36.93,27.46 38.35,27.46 39.37,28.47 39.37,29.69 39.17,29.9 39.17,34.57 40.79,36.19 40.79,44.53 42.42,46.15 42.42,51.84 44.25,53.67 45.87,53.67 46.48,54.28 46.48,61.59 48.31,63.42 50.14,63.42 51.36,64.64 v51.36,78.05
  Bottom 0.178: v51.36,78.05 51.36,78.26 50.95,78.66 50.95,79.68 50.14,80.49 43.43,80.49 42.82,79.88 42.82,77.6 J1.8
N$41  (via drill 0.38)
  Top 0.178: IC2.13 37.66,39.97 38.76,41.07 38.76,44.73 v38.35,45.08
  Bottom 0.178: v38.35,45.08 38.35,51.44 38.76,51.84 38.76,63.63 40.59,65.46 40.59,74.4 40.39,74.6 40.39,77.8 J1.9
N$42  (via drill 0.38)
  Top 0.178: IC2.14 37.7,40.62 38.35,41.27 38.35,44.12 v38.1,44.09
  Bottom 0.178: v38.1,44.09 37.54,44.73 37.54,45.54 37.95,45.95 37.95,51.64 38.35,52.05 38.35,63.83 40.21,65.66 40.18,73.99 39.17,75.01 J1.10
N$43  (via drill 0.38)
  Top 0.178: IC2.15 37.74,41.27 37.95,41.48 37.95,42.88 v37.69,43.1
  Bottom 0.178: v37.69,43.1 37.74,43.31 37.13,43.92 37.13,45.75 37.54,46.15 37.54,51.84 37.95,52.25 37.95,64.03 38.1,64.24 38.12,77.5 J1.11
N$44  (via drill 0.38)
  Top 0.178: IC2.12 36.44,39.33 36.12,39.65 36.12,44.32 v35.71,44.73
  Bottom 0.178: v35.71,44.73 35.71,54.48 34.9,55.3 34.9,56.52 36.32,57.94 36.32,64.24 37.74,65.66 37.74,75.36 J1.12
N$45  (via drill 0.38)
  Top 0.178: IC2.1 34.13,41.92 v34.49,42.29
  Bottom 0.178: v34.49,42.29 34.49,45.54 34.9,45.95 34.9,54.08 34.09,54.89 34.09,56.92 35.51,58.34 35.51,65.05 35.13,65.46 35.1,73.38 33.02,75.44 33.02,78.03 J1.13
N$46  (via drill 0.38)
  Top 0.178: IC2.5 32.54,39.33 v34.49,41.07
  Bottom 0.178: v34.49,41.07 35.31,41.88 35.31,43.51 34.9,43.92 34.9,45.14 35.31,45.54 35.31,54.28 34.49,55.09 34.49,56.72 35.92,58.14 35.92,65.25 35.51,65.66 35.51,75.06 J1.14
N$47  (via drill 0.38)
  Top 0.178: IC2.2 30.23,41.27 30.02,41.48 30.02,42.9 30.23,43.1 v33.48,43.1
  Bottom 0.178: v33.48,43.1 33.68,43.1 34.09,43.51 34.09,45.75 34.49,46.15 34.49,53.87 33.68,54.69 33.68,57.12 35.1,58.55 35.1,64.44 34.49,65.05 33.68,65.05 33.05,65.66 33.05,74.8 32.64,75.23 32.64,77.93 J1.15
N$48  (via drill 0.38)
  Top 0.178: v33.27,44.32 32.46,43.51 30.02,43.51 29.62,43.1 29.62,41.48 29.39,41.25 29.39,40.08 29.62,39.85 30.43,39.85 30.55,39.97 IC2.4
  Bottom 0.178: v33.27,44.32 33.27,45.54 34.09,46.36 34.09,53.67 33.27,54.48 33.27,57.33 34.7,58.75 34.7,64.24 34.29,64.64 33.48,64.64 32.66,65.46 32.66,74.4 31.65,75.41 31.65,76.38 J1.16
N$49
  Top 0.178: IC3.13 26.89,39.97 27.79,40.87 27.79,44.32 26.77,45.34 18.03,45.34 16.81,46.56 16.81,52.65 15.19,54.28 15.19,61.19 13.36,63.02 13.36,64.64 12.72,65.25 12.75,69.93 13.56,70.74 25.76,70.74 30.23,75.21 30.23,77.8 J1.17
N$50
  Top 0.178: IC3.14 26.93,40.62 27.38,41.07 27.38,44.12 26.57,44.93 17.83,44.93 16.41,46.36 16.41,52.45 14.78,54.08 14.78,60.99 12.95,62.81 12.95,64.44 12.34,65.05 12.34,70.13 13.36,71.15 25.55,71.15 29.01,74.6 J1.18
N$51
  Top 0.178: IC3.15 26.77,41.27 26.98,41.48 26.98,43.92 26.37,44.53 17.63,44.53 16,46.15 16,52.25 14.38,53.87 14.38,60.78 12.55,62.61 12.55,64.24 11.94,64.85 10.92,64.85 10.11,65.66 10.11,69.93 11.73,71.55 25.35,71.55 27.79,73.99 27.79,77.85 26.62,79.02 J1.19
N$52
  Top 0.178: IC3.12 25.47,39.33 25.35,39.45 25.35,43.51 24.74,44.12 17.42,44.12 15.6,45.95 15.6,52.05 13.97,53.67 13.97,60.58 12.14,62.41 12.14,64.03 11.73,64.44 10.72,64.44 9.73,65.46 9.7,70.13 11.53,71.96 24.94,71.96 26.57,73.58 26.57,76.38 J1.20
N$53
  Top 0.178: IC3.1 20.14,42.42 19.25,43.31 17.02,43.31 14.78,45.54 14.78,51.64 13.16,53.26 13.16,60.17 9.7,63.63 8.08,63.63 7.06,64.64 7.06,70.33 9.5,72.77 19.79,72.75 22.88,75.87 22.88,77.98 J1.21
N$54
  Top 0.178: IC3.5 20.76,39.33 22.1,40.67 22.1,42.9 21.28,43.71 17.22,43.71 15.19,45.75 15.19,51.84 13.56,53.47 13.56,60.38 9.91,64.03 8.28,64.03 7.47,64.85 7.47,70.13 9.7,72.36 19.91,72.36 23.22,75.62 J1.22
N$55
  Top 0.178: IC3.2 19.46,41.27 19.25,41.48 19.25,42.49 18.85,42.9 16.81,42.9 14.38,45.34 14.38,51.44 12.75,53.06 12.75,59.97 9.5,63.22 7.87,63.22 6.66,64.44 6.66,70.54 9.3,73.18 19.66,73.18 22.5,76.02 22.5,77.9 J1.23
N$56
  Top 0.178: J1.24 18.49,73.58 9.09,73.58 6.25,70.74 6.25,64.24 7.67,62.81 9.3,62.81 12.34,59.77 12.34,52.86 13.97,51.23 13.97,45.14 18.24,40.87 18.24,40.26 18.64,39.85 19.46,39.85 19.58,39.97 IC3.4
N$57  (via drill 0.38)
  Top 0.178: IC4.13 26.74,31.09 27.58,31.93 27.58,34.16 26.77,34.98 25.55,34.98 22.91,32.33 22.91,28.68 21.49,27.25 18.64,27.25 17.22,28.68 17.22,34.98 15.8,36.4 15.8,39.65 11.53,43.92 11.53,50.01 9.91,51.64 9.91,58.55 8.08,60.38 6.45,60.38 3.81,63.02 3.81,72.16 7.06,75.41 7.06,80.29 7.67,80.9 14.78,80.9 v15.39,80.7
  Bottom 0.178: v15.39,80.7 17.58,80.7 J1.25
N$58
  Top 0.178: IC4.14 25.36,31.74 23.72,30.1 23.72,28.27 21.9,26.44 18.24,26.44 16.41,28.27 16.41,34.57 14.99,35.99 14.99,39.24 10.72,43.51 10.72,49.61 9.09,51.23 9.09,58.14 7.67,59.56 6.05,59.56 3,62.61 3,72.57 6.25,75.82 6.25,80.9 7.06,81.71 14.38,81.71 14.58,81.91 16.81,81.91 17.42,81.31 17.42,77.9 J1.26
N$59
  Top 0.178: IC4.15 26.82,32.39 27.18,32.74 27.18,33.96 26.57,34.57 25.76,34.57 23.32,32.13 23.32,28.47 21.69,26.85 18.44,26.85 16.81,28.47 16.81,34.77 15.39,36.19 15.39,39.45 11.12,43.71 11.12,49.81 9.5,51.44 9.5,58.34 7.87,59.97 6.25,59.97 3.4,62.81 3.4,72.36 6.66,75.62 6.66,80.49 7.47,81.31 14.58,81.31 14.78,81.51 15.8,81.51 16.2,81.1 16.2,79.12 J1.27
N$60
  Top 0.178: IC4.12 26.7,30.43 27.99,31.72 27.99,34.37 26.98,35.38 25.35,35.38 22.5,32.54 22.5,28.88 21.28,27.66 18.85,27.66 17.63,28.88 17.63,35.18 16.2,36.6 16.2,39.85 11.94,44.12 11.94,50.22 10.31,51.84 10.31,58.75 8.28,60.78 6.66,60.78 4.22,63.22 4.22,71.96 7.47,75.21 7.47,80.09 7.87,80.49 14.17,80.49 14.99,79.68 14.99,77.8 J1.28
N$61
  Top 0.178: IC4.1 20.14,33.48 20.07,33.55 20.07,34.57 17.42,37.21 17.42,40.46 13.16,44.73 13.16,50.83 11.53,52.45 11.53,59.36 8.89,62 7.26,62 5.44,63.83 5.44,71.15 8.69,74.4 11.94,74.4 12.72,75.18 12.72,78 J1.29
N$62
  Top 0.178: IC4.5 21.21,30.43 22.1,31.32 22.1,33.15 17.83,37.41 17.83,40.67 13.56,44.93 13.56,51.03 11.94,52.65 11.94,59.56 9.09,62.41 7.47,62.41 5.84,64.03 5.84,70.94 8.89,73.99 12.55,73.99 13.77,75.21 J1.30
N$63
  Top 0.178: IC4.2 19.41,32.39 19.25,32.54 19.25,34.77 17.02,37.01 17.02,40.26 12.75,44.53 12.75,50.62 11.12,52.25 11.12,59.16 8.69,61.59 7.06,61.59 5.03,63.63 5.03,71.35 8.48,74.8 11.73,74.8 12.34,75.41 12.34,77.9 J1.31
N$64
  Top 0.178: IC4.4 19.22,31.09 19.05,30.91 18.44,30.91 18.03,31.32 18.03,35.38 16.61,36.8 16.61,40.06 12.34,44.32 12.34,50.42 10.72,52.05 10.72,58.95 8.48,61.19 6.86,61.19 4.62,63.42 4.62,71.55 8.28,75.21 9.96,75.21 J1.32
OUT1  (2 unrouted)
OUT2  (2 unrouted)
OUT3  (2 unrouted)
OUT4  (2 unrouted)
OUT5  (2 unrouted)
OUT6  (2 unrouted)
OUT7  (2 unrouted)
OUT8  (2 unrouted)
OUT_GND  (16 unrouted)
VDD_3V3EXP  (1 unrouted)
VDD_5V  (1 unrouted)

## Text on the board
tPlace: GND / COM | 3.7 / 3.6 | 3.1 / 3.0 | 2.7 / 2.6 | 2.5 / 2.4 | 2.3 / 2.2 | 2.1 / 2.0 | 1.7 / 1.6 | 0.7 / 0.6 | 0.5 / 0.4 | 0.3 / 0.2 | 0.1 / 0.0 | 3.5 / 3.4 | 3.3 / 3.2 | 1.5 / 1.4 | 1.3 / 1.2 | 1.1 / 1.0 | GND / COM | 7.7 / 7.6 | 7.5 / 7.4 | 7.3 / 7.2 | 7.1 / 7.0 | 6.1 / 6.0 | 5.1 / 5.0 | 4.7 / 4.6 | 4.5 / 4.4 | 4.3 / 4.2 | 4.1 / 4.0 | GND | +5V | 7 | Multiplexer / Capelet | 6 | 5 | 4 | 3 | 2 | rev. A2 / 05/16 | (c) Andrew / McPherson, / C4DM, QMUL | 1 | 0 | OUT | ch. 4-7 | ch. 0-3 | IN | Bypass: | 0 | 1 | 2 | 3 | 4 | 5 | 6 | 7 | C | GND